# Altium PCB PCB_Akira_Basic_2024-01-05.pcbdoc
Units mil, origin at the board's own origin, x right, y up, seen from the top; angles counter-clockwise.
Board outline 6370.68 x 3271.8 mil, 2 copper layers (Top Layer, Bottom Layer); 42 components, 36 nets, 161 pads, 38 vias.
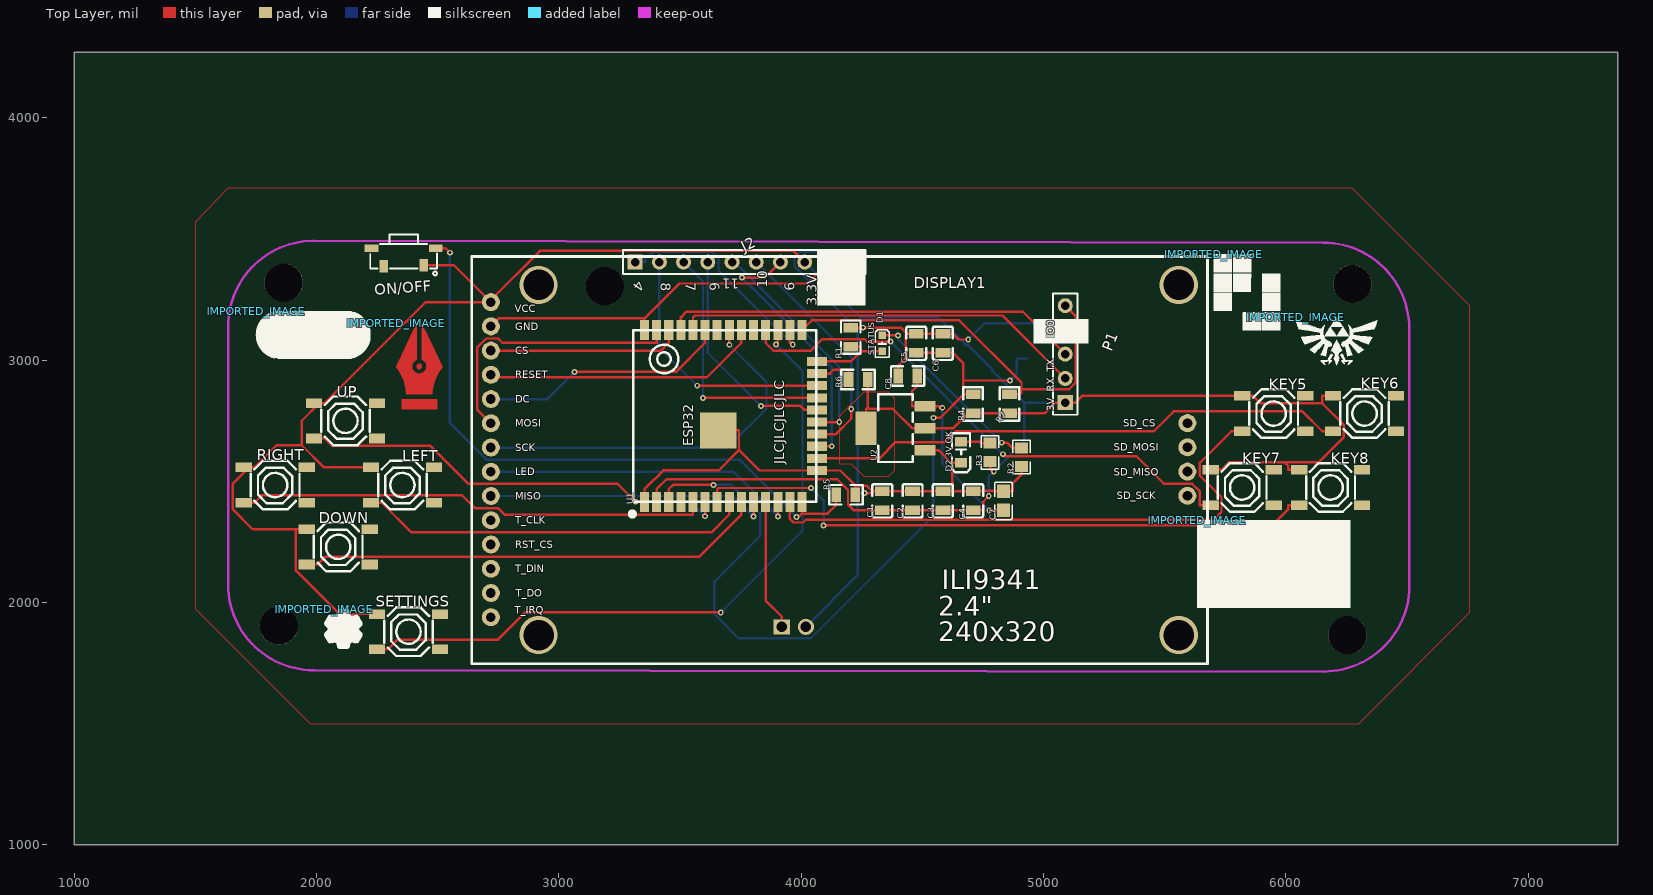
[diagram p0: Top Layer view]
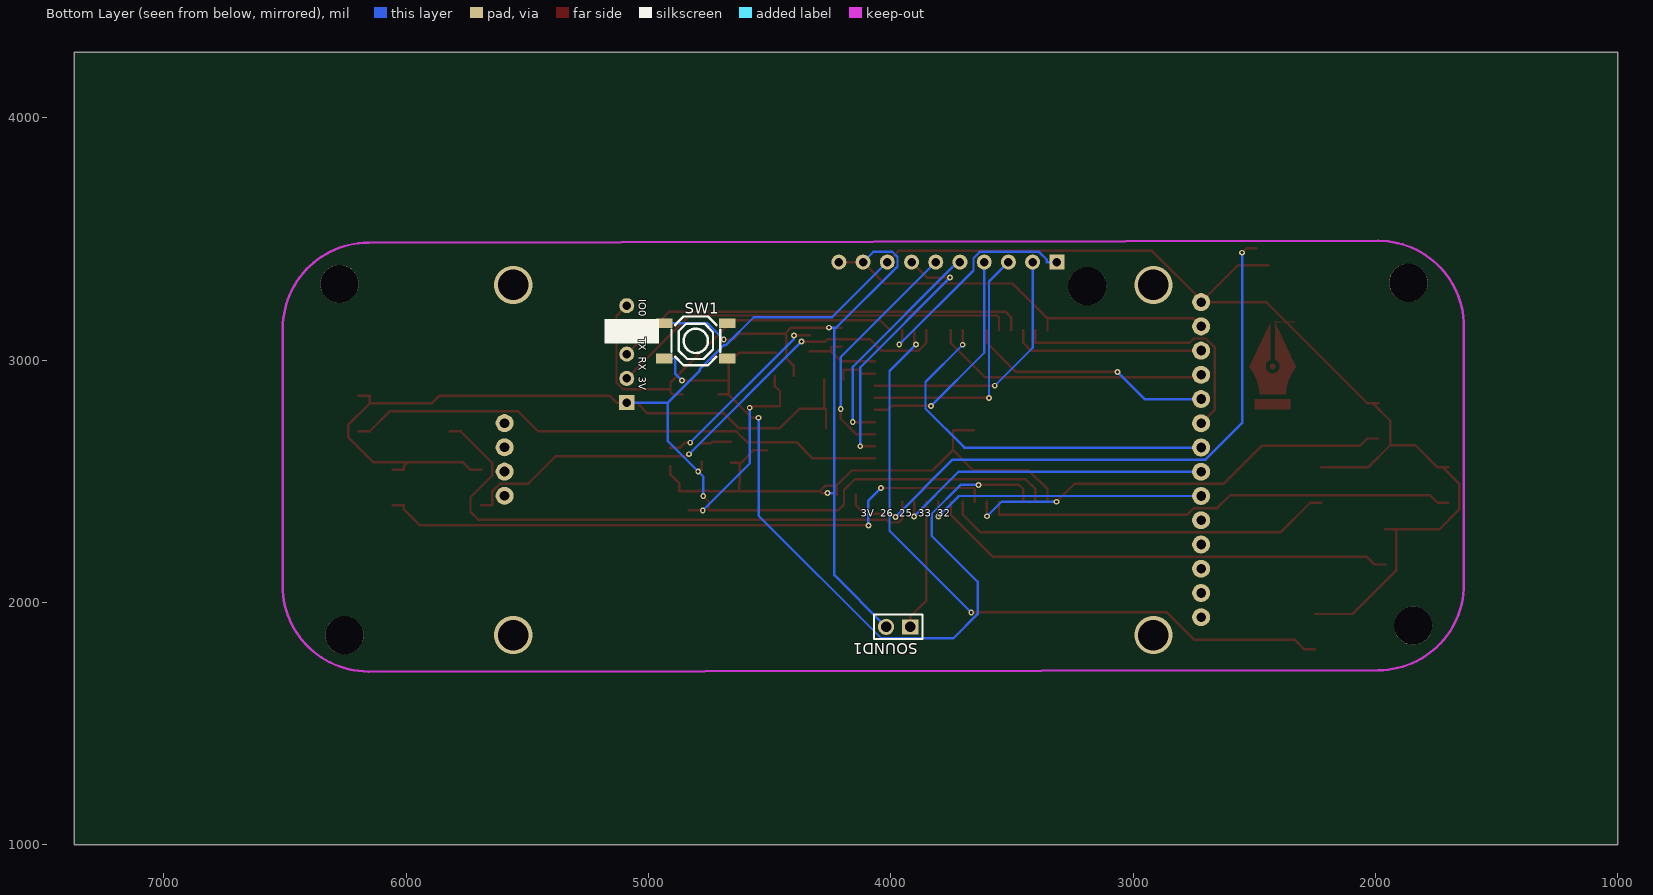
[diagram p1: Bottom Layer view, seen from below]

## Layer stack, top to bottom
Top Layer: signal copper (thickness not stored)
Dielectric: dielectric 12.6, FR-4, Dk 4.8
Bottom Layer: signal copper (thickness not stored)

## Board outline
7370.68,1000 1000,1000 1000,4271.8 7370.68,4271.8

## Components (designator, comment, footprint, x,y, rotation, side; value= is the part's Value field where it differs from the comment)
C1 "10uF" C0805#1 4335,2420 r270 top
C2 "10uF" C0805#1 4460,2420 r270 top
C3 "10uF" C0805#1 4585,2420 r90 top
C4 "100nF" C0805#1 4710,2420 r270 top
C5 "1uF" C0805#1 4475,3070 r270 top
C6 "100nF" C0805#1 4585,3070 r270 top
C7 "10uF" C0805#2 4835,2420 r270 top
C8 "100nF" C0805#1 4440,2935 r180 top
D1 "STATUS (BLUE)" LED0603-R-RD 4335,3070 r270 top
D2 "YELLOW" LED0805-RD 4660,2620 r90 top
DISPLAY1 "2.4_TFT_ILI9341_symbol" ILI9341_320X240_TFT_LCD 2720,3350 r0 top
DOWN "BUTTON_C9900016052" SW-SMD_4P-L5.1-W5.1-P3.70-LS6.5-TL-2#1 2090,2230 r0 top
IMPORTED_IMAGE "IMPORTED_IMAGE" IMPORTED_IMAGE#1 2329.78,3152.56 r0 top
IMPORTED_IMAGE "IMPORTED_IMAGE" IMPORTED_IMAGE#2 1751,3202.92 r0 top
IMPORTED_IMAGE "IMPORTED_IMAGE" IMPORTED_IMAGE#2 5635,2340.55 r0 top
IMPORTED_IMAGE "IMPORTED_IMAGE" IMPORTED_IMAGE#2 5702.18,3436.7 r0 top
IMPORTED_IMAGE "IMPORTED_IMAGE" IMPORTED_IMAGE#2 6041.12,3176.56 r0 top
IMPORTED_IMAGE "IMPORTED_IMAGE" IMPORTED_IMAGE#2 2032.99,1971.98 r0 top
J2 "HDR-M-2.54_1x10" HDR-M-2.54_1X10 3765,3405 r0 top
KEY5 "BUTTON_C9900016052" SW-SMD_4P-L5.1-W5.1-P3.70-LS6.5-TL-2#1 5950,2780 r0 top
KEY6 "BUTTON_C9900016052" SW-SMD_4P-L5.1-W5.1-P3.70-LS6.5-TL-2#1 6325,2780 r0 top
KEY7 "BUTTON_C9900016052" SW-SMD_4P-L5.1-W5.1-P3.70-LS6.5-TL-2#1 5820,2475 r0 top
KEY8 "BUTTON_C9900016052" SW-SMD_4P-L5.1-W5.1-P3.70-LS6.5-TL-2#1 6185,2475 r0 top
LEFT "BUTTON_C9900016052" SW-SMD_4P-L5.1-W5.1-P3.70-LS6.5-TL-2#1 2355,2485 r0 top
ON/OFF "TL3330AF260QG" SW-SMD_E-SWITCH_TL3330 2360,3425.04 r180 top
P1 "Header-Male-2.54_1x5" HDR-5X1/2.54 5090,3025 r90 top
R1 "10K" R0805#1 4205,3095 r270 top
R2 "470Ω" R0805#2 4910,2600 r270 top
R3 "470Ω" R0805#2 4780,2620 r270 top
R4 "10K" R0805#1 4710,2820 r270 top
R5 "10K" R0805#1 4185,2445 r180 top
R6 "10K" R0805#1 4235,2920 r180 top
R7 "10K" R0805#1 4860,2820 r90 top
RIGHT "BUTTON_C9900016052" SW-SMD_4P-L5.1-W5.1-P3.70-LS6.5-TL-2#1 1830,2485 r0 top
SETTINGS "BUTTON_C9900016052" SW-SMD_4P-L5.1-W5.1-P3.70-LS6.5-TL-2#1 2380,1880 r0 top
SOUND1 "HDR-M-2.54_1x2" HDR-M-2.54_1X2 3970,1900 r180 bottom
SW1 "RESET" SW-SMD_4P-L5.1-W5.1-P3.70-LS6.5-TL-2#2 4805,3080 r0 bottom
U1 "ESP32" WIFIM-SMD_38P-L19.2-W18.0-P1.27 3710,2770 r180 top
U2 "AMS1117-3.3" SOT-223-3_L6.5-W3.4-P2.30-LS7.0-BR 4390,2720 r0 top
UP "BUTTON_C9900016052" SW-SMD_4P-L5.1-W5.1-P3.70-LS6.5-TL-2#1 2120,2750 r0 top
? "" ? 4075,3269.9 r0 top
? "" ? 6191.84,2602.5 r0 top

## Footprints (in the part's own frame and the unit in brackets; to place one, negate y for a bottom-side part, rotate by r counter-clockwise, add the part's x,y. Pads: shape width x height; smd on the part's side, far side on the other; paste and mask are expansions set on the pad)
C0805#1 [mm]
  rect 1x1.55 smd: 1(-1,0) 2(1,0)
  silkscreen extent -1.75,-1.04 1.75,1.04
C0805#2 [mm]
  rect 1.41x1.35 smd: 1(-1,0) 2(1,0)
  silkscreen extent -1.96,-0.9 1.96,0.9
HDR-5X1/2.54 [mil]
  rect 62x62 hole 35: 1(-200,0)
  round 62 hole 35: 2(-100,0) 3(0,0) 4(100,0) 5(200,0)
  silkscreen extent -250,-50 250,50
HDR-M-2.54_1X2 [mm]
  rect 1.7x1.575 hole 1.1: 1(1.27,0)
  round 1.7 hole 1.1: 2(-1.27,0)
  silkscreen extent -2.54,-1.27 2.54,1.27
HDR-M-2.54_1X10 [mil]
  rect 62x62 hole 35: 1(-450,0)
  round 62 hole 35: 2(-350,0) 3(-250,0) 4(-150,0) 5(-50,0) 6(50,0) 7(150,0) 8(250,0) 9(350,0) 10(450,0)
  silkscreen extent -500,-50 500,50
ILI9341_320X240_TFT_LCD [mm]
  round 1.88 hole 1.02: 1(0,-2.8) 2(0,-5.34) 3(0,-7.88) 4(0,-10.42) 5(0,-12.96) 6(0,-15.5) 7(0,-18.04) 8(0,-20.58) 9(0,-23.12) 10(0,-25.66) 11(0,-28.2) 12(0,-30.74) 13(0,-33.28) 14(0,-35.82) 15(73,-23.1) 16(73,-20.56) 17(73,-18.02) 18(73,-15.48)
  silkscreen extent -2,-40.7 75.1,2
IMPORTED_IMAGE#1 [mil]
  Top Layer region: 21.63,-355.11 21.63,-312.71 168.52,-312.71 168.52,-355.11
  Top Layer region: 532 vertices and 0 holes, not listed, extent -0.25,-293.03 190.71,0
  Top Layer region: 94.56,-189.47 94.1,-189.46 93.66,-189.41 93.21,-189.35 92.77,-189.26 92.34,-189.16 91.91,-189.03 91.49,-188.88 91.07,-188.71 90.66,-188.52 90.26,-188.31 89.87,-188.09 89.48,-187.84 89.11,-187.58 88.74,-187.31 88.39,-187.01 88.04,-186.71 87.7,-186.39 87.38,-186.05 87.07,-185.7 86.77,-185.34 86.48,-184.97 86.21,-184.59 85.95,-184.19 85.7,-183.79 85.47,-183.38 85.25,-182.96 85.05,-182.53 84.86,-182.09 84.7,-181.65 84.54,-181.2 84.41,-180.74 84.29,-180.28 84.19,-179.82 84.11,-179.35 84.05,-178.88 84.01,-178.41 83.99,-177.94 83.99,-177.46 84.02,-176.99 84.06,-176.51 84.12,-176.04 84.21,-175.57 84.32,-175.1 84.46,-174.63 84.62,-174.16 84.8,-173.7 85.01,-173.25 85.24,-172.8 85.5,-172.35 85.79,-171.92 86.1,-171.49 86.44,-171.06 86.81,-170.65 87.57,-169.93 88.43,-169.29 89.36,-168.75 90.36,-168.29 91.4,-167.92 92.48,-167.65 93.59,-167.46 94.7,-167.37 95.81,-167.36 96.9,-167.46 97.95,-167.64 98.96,-167.92 99.9,-168.29 100.77,-168.76 101.55,-169.33 102.23,-169.99 102.74,-170.58 103.2,-171.18 103.63,-171.79 104.02,-172.39 104.37,-172.99 104.68,-173.6 104.96,-174.2 105.19,-174.81 105.39,-175.41 105.55,-176.01 105.68,-176.61 105.76,-177.21 105.81,-177.8 105.82,-178.39 105.79,-178.98 105.72,-179.56 105.62,-180.14 105.48,-180.72 105.3,-181.28 105.09,-181.84 104.84,-182.4 104.55,-182.94 104.22,-183.48 103.86,-184.01 103.46,-184.54 103.03,-185.05 102.55,-185.55 102.04,-186.04 101.5,-186.53 100.91,-187 100.29,-187.46 99.64,-187.91 99.18,-188.19 98.71,-188.45 98.25,-188.67 97.78,-188.87 97.32,-189.04 96.85,-189.18 96.39,-189.29 95.93,-189.37 95.47,-189.43 95.01,-189.46
IMPORTED_IMAGE#2 [mil]
  silkscreen extent 0,-197 472,0
LED0603-R-RD [mm]
  rect 0.8x0.8 smd: 1(0.851,0) 2(-0.851,0)
  silkscreen extent -1.44,-0.75 1.44,0.75
LED0805-RD [mm]
  rect 1x1.25 smd: 1(-1.1,0) 2(1.1,0)
  silkscreen extent -2.1,-0.95 1.98,0.96
R0805#1 [mm]
  rect 1x1.55 smd: 1(-1,0) 2(1,0)
  silkscreen extent -1.75,-1.02 1.75,1.02
R0805#2 [mm]
  rect 1.133x1.377 smd: 1(-0.966,0) 2(0.966,0)
  silkscreen extent -1.76,-0.92 1.76,0.92
SOT-223-3_L6.5-W3.4-P2.30-LS7.0-BR [mm]
  rect 2.2x1.1 smd: 1(3.099,-2.3) 2(3.099,0) 3(3.099,2.3)
  rect 2.2x3.5 smd: 4(-3.099,0)
  silkscreen extent -1.8,-3.55 1.8,3.55
SW-SMD_4P-L5.1-W5.1-P3.70-LS6.5-TL-2#1 [mm]
  rect 1.7x1 smd: 1(-3.3,1.85) 2(3.3,1.85) 3(-3.3,-1.85) 4(3.3,-1.85)
  silkscreen extent -2.55,-2.55 2.55,2.55
SW-SMD_4P-L5.1-W5.1-P3.70-LS6.5-TL-2#2 [mm]
  rect 1.7x1 smd: 1(3.3,-1.849) 2(-3.3,-1.85) 3(3.3,1.85) 4(-3.3,1.85)
  silkscreen extent -2.55,-2.55 2.55,2.55
SW-SMD_E-SWITCH_TL3330 [mm]
  rect 0.9x1.27 smd: 1(-2.1,0.84) 2(2.1,0.94)
  rect 1.45x0.8 smd: 3(3.375,-0.94) 4(-3.375,-0.94)
  silkscreen extent -3.5,-2.4 3.5,1.9
WIFIM-SMD_38P-L19.2-W18.0-P1.27 [mm]
  rect 0.95x2.1 smd: 1(9.045,9) 2(7.775,9) 3(6.505,9) 4(5.235,9) 5(3.965,9) 6(2.695,9) 7(1.425,9) 8(0.155,9) 9(-1.115,9) 10(-2.385,9) 11(-3.655,9) 12(-4.925,9) 13(-6.195,9) 14(-7.465,9) 25(-7.465,-9) 26(-6.195,-9) 27(-4.925,-9) 28(-3.655,-9) 29(-2.385,-9) 30(-1.115,-9) 31(0.155,-9) 32(1.425,-9) 33(2.695,-9) 34(3.965,-9) 35(5.235,-9) 36(6.505,-9) 37(7.775,-9) 38(9.045,-9)
  rect 2.1x0.95 smd: 15(-9.045,5.715) 16(-9.045,4.445) 17(-9.045,3.175) 18(-9.045,1.905) 19(-9.045,0.635) 20(-9.045,-0.635) 21(-9.045,-1.905) 22(-9.045,-3.175) 23(-9.045,-4.445) 24(-9.045,-5.715)
  rect 3.8x3.8 smd: 39(1.32,1.51)
  silkscreen extent -8.96,-9 10.55,10.51
? [mil]

## Free pads (board coordinates)
  round 157.48 hole 157.48 unplated: ""(1845,1905) ""(1865,3320) ""(3190,3305) ""(6255,1865) ""(6275,3315)

## Via types
v1: diameter 24.02, hole 12.01, Top Layer to Bottom Layer, tented both sides, 34 vias
v2: diameter 157.48, hole 125.98, Top Layer to Bottom Layer, tented both sides, 4 vias

## Nets (pads, with @x,y where several pads share a name; then routed paths per layer and width w, separated by ;. In a path a pad name is that pad's centre, name@x,y a point inside that pad or via, vN(x,y) a via of type N, cw(c..) or ccw(c..) an arc to the next point about the centre after c; other vN are vias at no path point)
3.3V: C7.2 C8.1 U2.3 | length 823.4
  Top Layer w10: C8.1 4479.37,2893.5 4457.7,2871.83 4457.7,2810.55 4484.85,2810.55 U2.3 4566.3,2810.55 4572.75,2804.1 v1(4582.7,2804.1) ; v1(4776.44,2380.63) C7.2
  Bottom Layer w10: v1(4582.7,2804.1) 4582.7,2574.37 v1(4776.44,2380.63)
+3.3V: C1.2 C2.2 C3.1 C4.2 DISPLAY1.1 DOWN.1 J2.8 KEY5.1 KEY6.1 KEY7.1 KEY8.1 LEFT.1 ON/OFF.1 P1.1 R3.2 R4.2 R6.1 R7.1 RIGHT.1 SETTINGS.1 U1.2 U2.2 U2.4 UP.1 | length 11082.5
  Top Layer w10: RIGHT.1 RIGHT.1@1722.31,2557.84 ; DOWN.1 1915.62,2302.84 1915.55,2302.77 ; UP.1 UP.1@2012.31,2822.84 ; LEFT.1 2180.62,2557.84 2031.13,2557.84 1939.75,2649.22 ; SETTINGS.1 2094.89,1952.84 1915.55,2132.18 1915.55,2302.77 ; ON/OFF.1 2567.79,3391.97 DISPLAY1.1@2715.48,3244.28 ; U1.2 3403.9,2468 3444.61,2508.71 4149.08,2508.71 4193.63,2464.16 4193.63,2405.11 4218.11,2380.63 C1.2 C2.2 C3.1 C4.2 4751.5,2380.63 4751.5,2416.27 v1(4774.47,2439.24) ; J2.8 3968.81,3451.19 2922.39,3451.19 DISPLAY1.1@2715.48,3244.28 ; U2.4 4268,2799.89 4274.37,2799.89 ; R6.1 4274.37,2799.89 ; R3.2 4780,2548.67 4787.05,2548.67 v1(4795.19,2540.53) ; KEY7.1 5734.53,2547.84 5765.28,2578.59 5994.43,2578.59 ; KEY8.1 6010.62,2547.84 6010.62,2562.4 5994.43,2578.59 ; KEY6.1 6150.62,2852.84 6150.62,2822.1 ; RIGHT.1@1722.31,2557.84 1655.55,2491.08 1655.55,2384.32 1737.1,2302.77 1915.55,2302.77 ; RIGHT.1@1722.31,2557.84 1744.53,2557.84 1835.91,2649.22 1939.75,2649.22 ; 1939.75,2649.22 1939.75,2750.28 UP.1@2012.31,2822.84 ; UP.1@2012.31,2822.84 2034.53,2822.84 2451.45,3239.76 DISPLAY1.1 DISPLAY1.1@2715.48,3244.28 ; 4274.37,2799.89 4377.81,2799.89 4457.7,2720 U2.2 4628.62,2720 4689.25,2780.63 R4.2 R7.1 5003.64,2780.63 5048.01,2825 P1.1 5111,2825 5131.99,2825 5159.83,2852.84 KEY5.1 5864.53,2852.84 5895.27,2822.1 6150.62,2822.1 ; 5994.43,2578.59 6135.59,2578.59 6239.6,2682.6 6239.6,2733.12 6150.62,2822.1
  Bottom Layer w10: J2.8 4242.72,3177.28 4565.7,3177.28 4680.38,3062.6 4689.17,3062.6 4789.4,2962.37 4789.4,2956.04 4920.44,2825 ; v1(4774.47,2439.24) 4774.47,2519.81 v1(4795.19,2540.53) 4920.44,2665.78 4920.44,2825 ; P1.1 4920.44,2825
CS: DISPLAY1.3 U1.36 | length 799.6
  Top Layer w10: DISPLAY1.3 3421.66,3039.76 3453.9,3072 U1.36
DC: DISPLAY1.5 U1.33 | length 1032.4
  Top Layer w10: v1(3065.41,2952.02) 3483.92,2952.02 3603.9,3072 U1.33
  Bottom Layer w10: DISPLAY1.5 2953.15,2839.76 v1(3065.41,2952.02)
EN: C5.2 C6.2 R4.1 SW1.3 U1.3 | length 3424.7
  Top Layer w10: U1.3 3453.9,2468 3471.55,2485.65 v1@3638.05,2485.65 ; C5.2 C6.2 4626.5,3030.63 4668.5,2988.63 4668.5,2916.35 ; v1(4545.89,2762.65) 4575.29,2762.65 4668.5,2855.86 4668.5,2859.37 ; R4.1 4668.5,2859.37 ; v1(4861.7,2916.35) 4668.5,2916.35 ; 4668.5,2859.37 4668.5,2916.35
  Bottom Layer w10: v1@3638.05,2485.65 3712.52,2485.65 3831.55,2366.62 3831.55,2274.99 3642.3,2085.74 3642.3,1952.23 3741.89,1852.64 4040.08,1852.64 4545.89,2358.45 v1(4545.89,2762.65) ; v1(4861.7,2916.35) 4890.47,2945.12 4890.47,3007.15 SW1.3
  other v1: 3638.05,2485.65
GND: C1.1 C2.1 C3.2 C4.1 C5.1 C6.1 C7.1 C8.2 D2.1 DISPLAY1.2 J2.9 J2.10 P1.4 R1.1 R2.2 R5.1 SOUND1.2 SW1.1 U1.1 U1.15 U1.38 U1.39 U2.1 | length 7089.8
  Top Layer w10: DISPLAY1.2 2752.93,3172.69 3353.9,3172.69 ; U1.1 3353.9,2468 3431.63,2545.73 3660.37,2545.73 3743.82,2629.18 ; U1.38 3353.9,3172.69 ; U1.39 3743.82,2710.56 3743.82,2629.18 ; R1.1 v1(4255.02,3134.37) 4412.48,3134.37 4437.48,3109.37 ; J2.10 J2.9 4026.73,3316.73 3497.94,3316.73 3353.9,3172.69 ; R5.1 4224.37,2482.53 ; v1(4262.28,2451.58) 4285.71,2451.58 4293.5,2459.37 ; C8.2 4400.63,2976.5 4431.31,3007.18 4431.31,3103.2 4437.48,3109.37 ; U2.1 4566.3,2629.45 4619.06,2576.69 4624.4,2576.69 ; D2.1 4624.4,2576.69 ; v1(4689.93,3085.66) 4650.21,3085.66 4626.5,3109.37 C6.1 4543.5,3109.37 C5.1 4437.48,3109.37 ; R2.2 4910,2559.29 4910,2528.67 4872.57,2491.24 4872.57,2459.37 C7.1 4797.44,2459.37 4794.51,2462.3 4754.43,2462.3 4751.5,2459.37 C4.1 4626.5,2459.37 ; 3743.82,2629.18 3828,2545 U1.15 4161.9,2545 4224.37,2482.53 ; 4224.37,2482.53 4270.34,2482.53 4293.5,2459.37 ; 4293.5,2459.37 C1.1 C2.1 C3.2 4626.5,2459.37 ; 4624.4,2576.69 4624.4,2497.91 4626.5,2495.81 4626.5,2459.37
  Bottom Layer w10: SOUND1.2 4233.39,2113.39 4233.39,2451.58 ; J2.9 4072.09,3447.91 3994.45,3447.91 3972.83,3426.29 3972.83,3387.09 4225.55,3134.37 4233.39,3134.37 ; v1(4255.02,3134.37) 4233.39,3134.37 ; v1(4262.28,2451.58) 4233.39,2451.58 ; v1(4689.93,3085.66) 4757.07,3152.8 SW1.1 4957.15,3152.8 4979.38,3152.8 5007.18,3125 P1.4 ; 4233.39,2451.58 4233.39,3134.37
GPIO0: P1.5 R7.2 U1.25 | length 1691.4
  Top Layer w10: U1.25 4044.69,3165.12 4651.88,3165.12 4909.46,2907.54 4909.46,2880.57 ; R7.2 4901.5,2859.37 4909.46,2867.33 4909.46,2880.57 ; P1.5 5132.33,3182.67 5132.33,2907.04 5105.86,2880.57 4909.46,2880.57
GPIO4: J2.1 U1.26 | length 929
  Top Layer w10: U1.26 3953.9,3072 3958.32,3072 v1(3965.66,3064.66)
  Bottom Layer w10: J2.1 3356.99,3405 3356.99,3415.5 3388.55,3447.06 3633.19,3447.06 3659.34,3420.91 3659.34,3370.98 v1(3965.66,3064.66)
GPIO6: J2.4 U1.20 | length 923.1
  Top Layer w10: v1(3834.12,2811.54) 3997.23,2811.54 4013.77,2795 U1.20
  Bottom Layer w10: J2.4 3615,3030.66 v1(3834.12,2811.54)
GPIO7: J2.3 U1.21 | length 1064.8
  Top Layer w10: v1(3595.36,2844.43) 4013.2,2844.43 4013.77,2845 U1.21
  Bottom Layer w10: J2.3 3595.36,3324.64 v1(3595.36,2844.43)
GPIO8: J2.2 U1.22 | length 1069.3
  Top Layer w10: v1(3571.71,2895) U1.22
  Bottom Layer w10: J2.2 3415,3051.71 v1(3571.71,2895)
GPIO9: J2.7 U1.17 | length 1095.5
  Top Layer w10: v1(3756.14,3341.09) 3851.09,3341.09 J2.7 ; U1.17 4118.43,2645 v1(4126.69,2645)
  Bottom Layer w10: v1(3756.14,3341.09) 4126.69,2970.54 v1(4126.69,2645)
GPIO10: J2.6 U1.18 | length 976.3
  Top Layer w10: U1.18 4143.72,2695 4207.16,2758.44 v1(4207.16,2798.82)
  Bottom Layer w10: J2.6 4207.16,3012.84 v1(4207.16,2798.82)
GPIO11: J2.5 U1.19 | length 940.3
  Top Layer w10: U1.19 v1(4157.36,2745)
  Bottom Layer w10: J2.5 3724.85,3405 4157.36,2972.49 v1(4157.36,2745)
KEY1: U1.6 UP.3 | length 1806.4
  Top Layer w10: UP.3 2034.53,2677.16 2065.28,2646.41 2470.85,2646.41 2627.5,2489.76 3243.48,2489.76 v1(3317.06,2416.18) ; v1(3603.9,2356.11) U1.6
  Bottom Layer w10: v1(3317.06,2416.18) 3543.83,2416.18 v1(3603.9,2356.11)
KEY2: RIGHT.3 U1.5 | length 1953.1
  Top Layer w10: RIGHT.3 1744.53,2412.16 1775.27,2442.9 2600.69,2442.9 2653.83,2389.76 2750.12,2389.76 2778.11,2361.77 3552.33,2361.77 3553.9,2363.34 U1.5
KEY3: DOWN.3 U1.9 | length 1931.6
  Top Layer w10: DOWN.3 2004.53,2157.16 2037.12,2189.75 3580.31,2189.75 3753.9,2363.34 U1.9
KEY4: LEFT.3 U1.8 | length 1612.3
  Top Layer w10: LEFT.3 2269.53,2412.16 2391.93,2289.76 3630.32,2289.76 3703.9,2363.34 U1.8
KEY5: KEY5.3 U1.13 | length 2343.8
  Top Layer w10: U1.13 3953.9,2363.34 3953.9,2344.83 3968.38,2330.35 4007.93,2330.35 4019.2,2341.62 5701.9,2341.62 5734.6,2374.32 5734.6,2434.55 5645.55,2523.6 5645.55,2577.09 5775.62,2707.16 KEY5.3
KEY6: KEY6.3 U1.16 | length 2243.2
  Top Layer w10: U1.16 4322.84,2595 4390,2662.16 4593.49,2662.16 4637.94,2706.61 5455.36,2706.61 5537.76,2789.01 6068.77,2789.01 6150.62,2707.16 KEY6.3
KEY7: KEY7.3 U1.28 | length 2238.5
  Top Layer w10: U1.28 3853.9,3072 3887.42,3038.48 4038.82,3038.48 4086.72,3086.38 4262.56,3086.38 4272.25,3076.69 v1(4368.82,3076.69) ; v1(4833.19,2612.32) 4840.82,2604.69 5382.96,2604.69 5497.23,2490.42 5613.47,2490.42 5645.62,2458.27 5645.62,2402.16 KEY7.3
  Bottom Layer w10: v1(4368.82,3076.69) v1(4833.19,2612.32)
KEY8: KEY8.3 U1.7 | length 2622.7
  Top Layer w10: U1.7 3653.9,2468 3658.63,2472.73 v1(4041.02,2472.73) ; v1(4093.12,2318.56) 5942.36,2318.56 6010.62,2386.82 6010.62,2402.16 KEY8.3
  Bottom Layer w10: v1(4041.02,2472.73) 4093.12,2420.63 v1(4093.12,2318.56)
KEY_ON/OFF: ON/OFF.4 R5.2 U1.14 | length 2634.6
  Top Layer w10: ON/OFF.4 2532.36,3462.04 2550.58,3443.82 v1(2551,3443.82) ; v1(3981.6,2353.41) 3990,2353.41 4003.9,2367.31 ; U1.14 4003.9,2367.31 ; R5.2 4145.63,2403.5 4109.44,2367.31 4003.9,2367.31
  Bottom Layer w10: v1(2551,3443.82) 2551,2740.37 2701.61,2589.76 3745.25,2589.76 v1(3981.6,2353.41)
KEY_SETTINGS: SETTINGS.3 U1.27 | length 2834.4
  Top Layer w10: SETTINGS.3 2294.53,1807.16 2334.93,1847.56 2749.75,1847.56 2861.5,1959.31 v1(3668.72,1959.31) ; v1(3896.84,3064.94) 3903.9,3072 U1.27
  Bottom Layer w10: v1(3668.72,1959.31) 4005.82,2296.41 4005.82,2955.96 v1(3896.84,3064.94)
LED: DISPLAY1.8 U1.12 | length 1321.7
  Top Layer w10: U1.12 3903.9,2356.75 v1(3904.99,2355.66)
  Bottom Layer w10: DISPLAY1.8 3720.89,2539.76 v1(3904.99,2355.66)
MISO: DISPLAY1.9 U1.10 | length 1179.2
  Top Layer w10: v1(3803.9,2355.36) 3803.9,2363.34 U1.10
  Bottom Layer w10: DISPLAY1.9 3719.5,2439.76 v1(3803.9,2355.36)
MOSI: DISPLAY1.6 U1.37 | length 1151.7
  Top Layer w10: DISPLAY1.6 2663.48,2796.28 2663.48,3052.46 2700.78,3089.76 2748.87,3089.76 2766.7,3071.93 3403.83,3071.93 3403.9,3072 U1.37
R1_2: D1.1 R1.2 U1.24 | length 346.7
  Top Layer w10: U1.24 4118.43,2995 4205,2995 4246.5,3036.5 ; R1.2 4246.5,3055.63 4246.5,3036.5 ; D1.1 4246.5,3036.5
R2_1: D1.2 R2.1 | length 776.5
  Top Layer w10: D1.2 4361.74,3103.5 4362.83,3102.41 v1(4400.24,3102.41) ; v1(4827.98,2659.89) 4850.05,2659.89 4871.9,2638.04 R2.1
  Bottom Layer w10: v1(4400.24,3102.41) 4400.24,3087.63 v1(4827.98,2659.89)
R3_1: D2.2 R3.1 | length 122.2
  Top Layer w10: D2.2 4736.63,2663.31 4741.9,2658.04 R3.1
R6_2: R6.2 U1.23 | length 177.9
  Top Layer w10: U1.23 4118.43,2945 4134.93,2961.5 4195.63,2961.5 R6.2
RESET: DISPLAY1.4 U1.30 | length 1150
  Top Layer w10: DISPLAY1.4 2730.8,2928.96 3610.86,2928.96 3753.9,3072 U1.30
RX: P1.2 U1.34 | length 1699.2
  Top Layer w10: U1.34 3553.9,3176.66 3561.76,3184.52 4830.48,3184.52 P1.2
SCK: DISPLAY1.7 U1.31 | length 1591.5
  Top Layer w10: v1(3703.9,3064.04) U1.31
  Bottom Layer w10: DISPLAY1.7 3697.12,2639.76 3857.19,2799.83 3857.19,2910.75 v1(3703.9,3064.04)
SOUND: SOUND1.1 U1.11 | length 543
  Top Layer w10: U1.11 3853.9,2008.09 3920,1941.99 SOUND1.1
TX: P1.3 U1.35 | length 1721.1
  Top Layer w10: U1.35 3503.9,3176.66 3527.81,3200.57 4914.43,3200.57 P1.3
pads on no net: DISPLAY1.10 DISPLAY1.11 DISPLAY1.12 DISPLAY1.13 DISPLAY1.14 DISPLAY1.15 DISPLAY1.16 DISPLAY1.17 DISPLAY1.18 DOWN.2 DOWN.4 KEY5.2 KEY5.4 KEY6.2 KEY6.4 KEY7.2 KEY7.4 KEY8.2 KEY8.4 LEFT.2 LEFT.4 ON/OFF.2 ON/OFF.3 RIGHT.2 RIGHT.4 SETTINGS.2 SETTINGS.4 SW1.2 SW1.4 U1.4 U1.29 U1.32 UP.2 UP.4
copper on no net:
  other v2: 2916.85,1865.75 5558.58,1865.75 2916.85,3310.63 5558.58,3310.63

## Polygon pours and split planes (outlines as drawn)
+3.3V on Top Layer (solid): 4385,2720 4385,2545 4360,2520 4260,2520 4210,2570 4160,2570 4160,2770 4260,2870 4360,2870 4385,2845
GND on Top Layer (solid): 1500,3570 1500,1975 1975,1500 6300,1500 6760,1960 6760,3225 6275,3710 1635,3710 1630,3705

## Keep-outs
Keep-Out Layer:
  lines w10: 1635.59,2075.39 ccw(c1989.92,2075.39) 1989.92,1721.06 ; 1635.59,3138.38 cw(c1989.92,3138.38) 1989.92,3492.71 ; 6155,3485 cw(c6155,3130.67) 6509.33,3130.67 ; 6155.67,1715.67 ccw(c6155.67,2070) 6510,2070

## Silkscreen, mask and mechanical layers (free items; w line width, h text height)
Top Overlay:
  rectangle: 4960,3070 5185,3170
  rectangle: 4065,3225 4165,3450
  rectangle: 4165,3225 4265,3450
  text "11" at 3745,3335.3 h40 r180
  text "4" at 3323.82,3331.76 h40 r234
  text "8" at 3420,3320 h40 r270
  text "7" at 3525,3320 h40 r270
  text "6" at 3620.08,3320.16 h40 r275
  text "9" at 3930.08,3320.16 h40 r275
  text "10" at 3860,3299 h40 r90
  text "3.3V" at 4065,3225 h40 r90
  text "STATUS" at 4302.5,3020 h25 r90
  text "3V  RX  TX       IO0" at 5044.79,2789.84 h30 r90
  text "3V OK" at 4622.36,2598.23 h25 r90
  text "JLCJLCJLCJLC" at 3930,2570 h40 r90
Bottom Overlay:
  rectangle: 4957.5,3070 5182.5,3170
  text "IO0       TX  RX  3V" at 5039.72,3251.45 h30 r90
  text "3V  26  25  33  32" at 4125,2355 h30

## Text inside footprints (layer, text, board x,y; h text height)
DISPLAY1: Top Overlay "RESET" at 2820,2924.76 h30; Top Overlay "MOSI" at 2820,2724.76 h30; Top Overlay "T_DIN" at 2820,2124.76 h30; Top Overlay "T_DO" at 2823.22,2024.76 h30; Top Overlay "T_CLK" at 2820,2324.76 h30; Top Overlay "MISO" at 2820,2424.76 h30; Top Overlay "RST_CS" at 2820,2224.76 h30; Top Overlay "CS" at 2820,3024.76 h30; Top Overlay "T_IRQ" at 2818.43,1953.11 h30; Top Overlay "LED" at 2820,2524.76 h30; Top Overlay "SCK" at 2820,2624.76 h30; Top Overlay "DC" at 2820,2824.76 h30; Top Overlay "GND" at 2820,3124.76 h30; Top Overlay "VCC" at 2818.43,3197.2 h30; Top Overlay "SD_SCK" at 5302.68,2425.55 h30; Top Overlay "SD_CS" at 5330.24,2724.76 h30; Top Overlay "SD_MOSI" at 5290.87,2626.34 h30; Top Overlay "SD_MISO" at 5290.87,2523.98 h30; Top Overlay "ILI9341" at 4580,2055 h80; Top Overlay "2.4\"" at 4565,1945 h80; Top Overlay "240x320" at 4565,1840 h80